# Altium PCB zulu_a7.PcbDoc (part 4 of 4)
Units mm, origin at the board's own origin, x right, y up, seen from the top; angles counter-clockwise.
Board outline 69.85 x 25.4 mm, 6 copper layers (Top Layer, L2-GND, L3-SIG, L4-SIG, L5-VCC3V3, Bottom Layer), stack 1.65 mm thick; 178 components, 177 nets, 839 pads, 534 vias.
Unrouted connection lines stored in the file: 46.
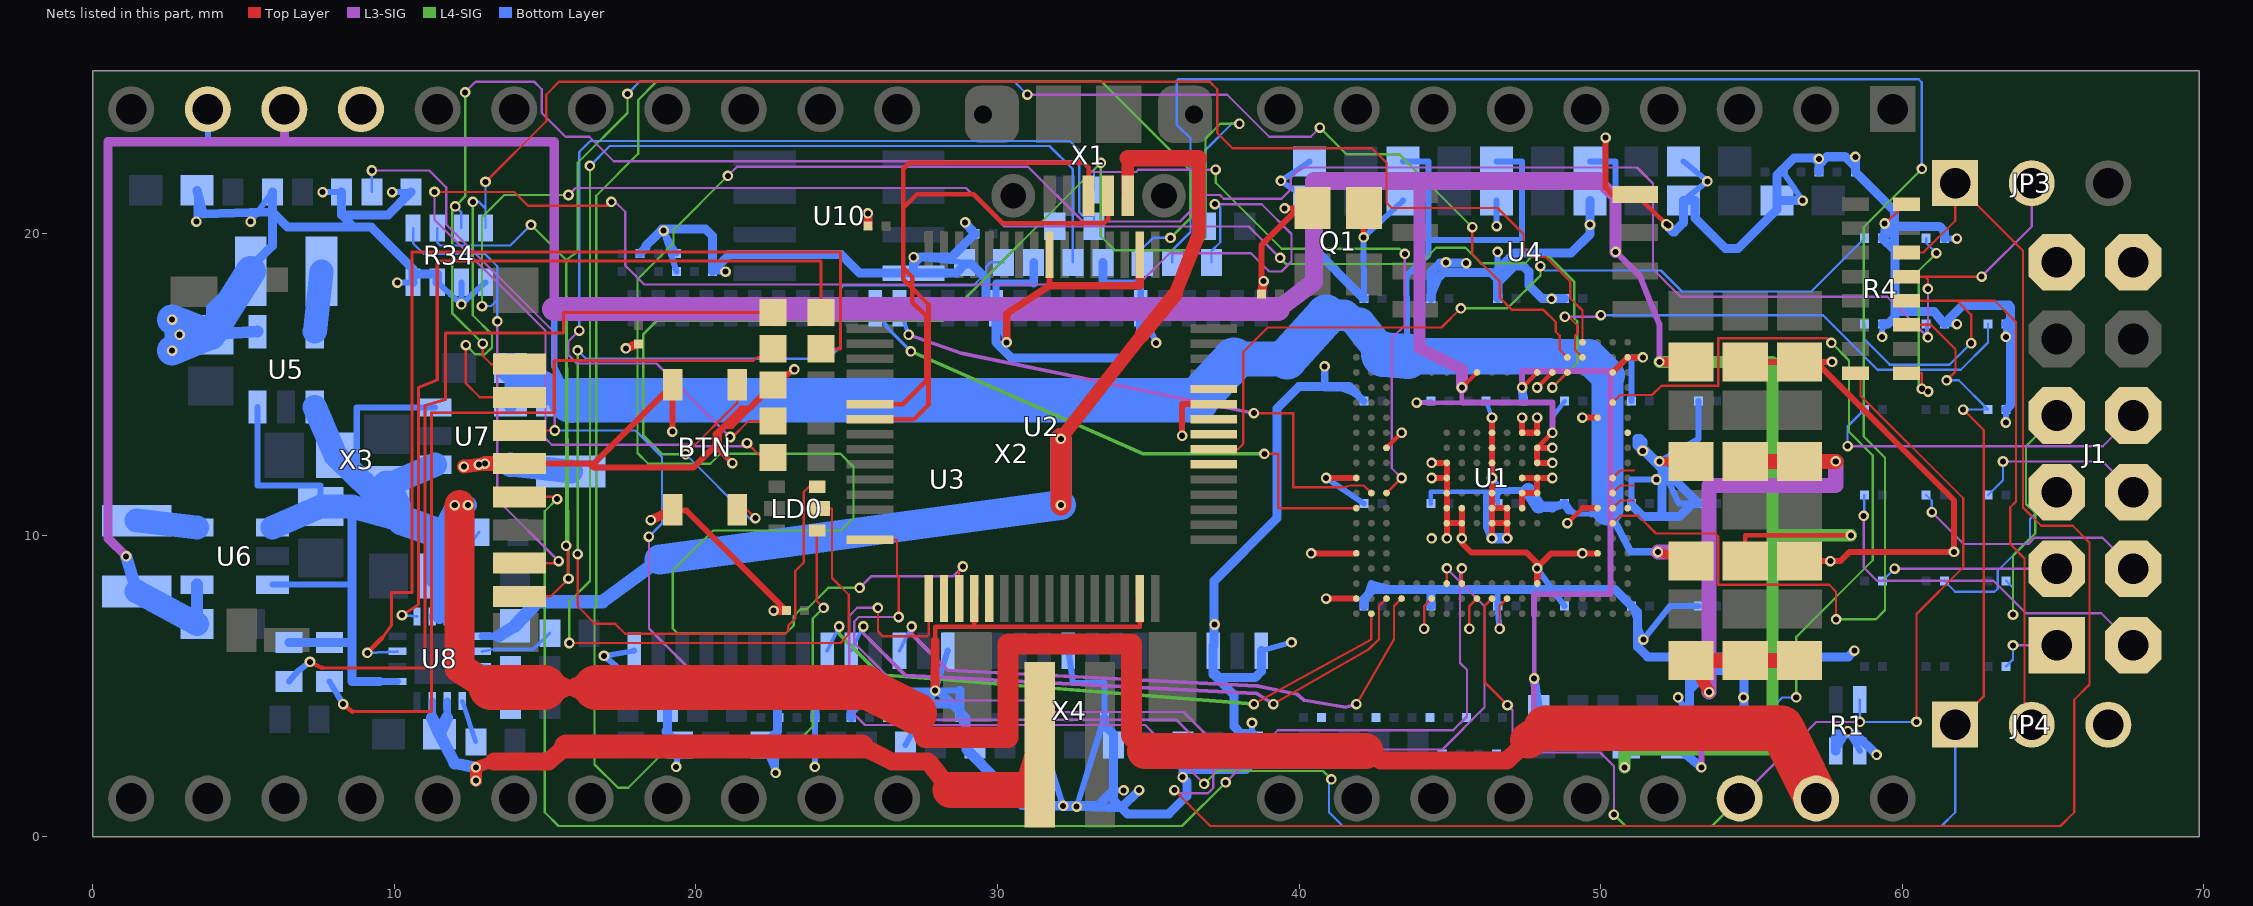
[diagram p7: the nets of this part, all layers, seen from the top]

## Via types
v1: diameter 0.35, hole 0.2, Top Layer to Bottom Layer, tented both sides, 534 vias

## Nets (pads, with @x,y where several pads share a name; then routed paths per layer and width w, separated by ;. In a path a pad name is that pad's centre, name@x,y a point inside that pad or via, vN(x,y) a via of type N, cw(c..) or ccw(c..) an arc to the next point about the centre after c; other vN are vias at no path point) (continued)
LED1: R83.1 U1.N18 | length 62
  Top Layer w0.076: U1.N18@50.4,10.4 50.65,10.65 51.113,10.65 51.25,10.65 51.841,10.058 53.797,10.058 53.899,9.957 53.899,8.357 57.582,8.357 57.81,8.128 v1(57.81,7.214)
  L4-SIG w0.076: v1(57.81,7.214) 59.131,7.214 59.436,7.518 59.436,12.573 58.725,13.284 58.725,20.218 v1(60.655,22.149)
  Bottom Layer w0.076: R83.1@35.8,19.05 35.8,19.456 36.398,20.055 36.398,23.165 35.941,23.622 35.941,25.07 35.992,25.121 60.554,25.121 60.655,25.019 v1(60.655,22.149)
LED2: R84.1 U1.M19
N$BTN: BTN.3 BTN.4 R85.1 R86.2 | length 45.4
  Top Layer w0.076: v1(19.66,12.686) 21.375,14.402 BTN.4@21.375,14.995 ; BTN.3@21.375,10.845 21.375,10.82 21.717,10.82 v1(21.971,10.566)
  L4-SIG w0.076: v1(19.66,12.686) 18.886,12.686 18.247,13.325 18.247,16.662 18.689,17.104 28.178,17.104 v1(33.426,22.352) 33.426,19.914 33.884,19.456 36.474,19.456 36.9,19.882 36.9,23.159 37.389,23.647 v1(38.024,23.647)
  Bottom Layer w0.076: v1(19.66,12.686) 21.78,10.566 v1(21.971,10.566) ; R86.2@33.2,21.45 33.2,22.126 v1(33.426,22.352) ; R85.1@36.9,20.25 36.9,22.778 37.77,23.647 v1(38.024,23.647)
N$LD0B: LD0.1 R80.2 | length 38
  Top Layer w0.076: v1(16.078,9.373) 16.078,7.645 16.662,7.061 17.323,7.061 17.653,6.731 22.962,6.731 23.063,6.833 23.063,7.01 23.292,7.239 23.292,8.814 23.571,9.093 23.571,11.432 23.749,11.61 LD0.1@24.025,11.61
  L4-SIG w0.076: v1(16.078,9.373) v1(16.078,16.129)
  Bottom Layer w0.076: v1(16.078,16.129) 16.358,15.85 24.384,15.85 24.79,16.256 24.79,18.186 24.892,18.288 29.21,18.288 29.616,18.694 29.616,18.898 29.769,19.05 R80.2@30.2,19.05
N$LD0G: LD0.5 R82.2 | length 61.6
  Top Layer w0.076: LD0.5@24.025,10.16 24.003,10.16 24.003,7.823 v1(24.232,7.595)
  L4-SIG w0.076: v1(24.232,7.595) 23.876,7.239 23.876,3.658 23.367,3.148 19.277,3.148 17.755,1.626 17.413,1.626 16.637,2.402 16.637,7.569 16.689,7.622 16.689,21.261 18.085,22.657 18.085,24.435 18.694,25.044 33.452,25.044 36.398,22.098 36.398,20.523 v1(35.738,19.863)
  Bottom Layer w0.076: R82.2@34.8,19.05 34.8,19.509 35.154,19.863 v1(35.738,19.863)
N$LD0R: LD0.3 R81.2 | length 50
  Top Layer w0.076: v1(15.799,6.426) 24.79,6.426 25.07,6.706 25.07,8.026 24.511,8.585 24.511,10.885 LD0.3@24.1,10.885
  L4-SIG w0.076: v1(15.799,6.426) 15.799,7.798 16.485,8.484 v1(16.485,22.25)
  Bottom Layer w0.076: v1(16.485,22.25) 17.142,22.907 31.728,22.907 32.5,22.135 R81.2@32.5,19.05
N$LD1A: LD1.A R83.2 | length 55.3
  Top Layer w0.076: v1(11.328,21.387) 13.97,21.387 14.427,20.93 17.069,20.93 v1(17.196,21.057) ; v1(21.692,13.056) 22.162,12.585 LD1.A@22.55,12.585
  L3-SIG w0.076: v1(11.328,21.387) 11.328,20.466 15.011,16.783 15.011,13.208 15.215,13.005 19.939,13.005 19.99,12.954 21.59,12.954 v1(21.692,13.056) ; v1(17.196,21.057) 17.323,21.057 17.653,20.726 17.653,18.948 18.288,18.313 34.671,18.313 35.712,19.355 38.405,19.355 39.014,18.745 39.421,18.745 39.751,19.075 39.751,19.99 38.76,20.98 v1(37.211,20.98)
  Bottom Layer w0.076: R83.2@37.1,19.05 37.1,19.431 37.389,19.72 37.389,20.879 37.287,20.98 v1(37.211,20.98)
N$LD2A: LD2.A R84.2 | length 34.8
  Top Layer w0.076: v1(21.133,13.259) 21.209,13.259 21.735,13.785 LD2.A@22.55,13.785
  L3-SIG w0.076: v1(16.129,16.789) 15.773,16.434 15.773,15.977 16.053,15.697 18.694,15.697 v1(21.133,13.259)
  Bottom Layer w0.076: v1(16.129,16.789) 16.129,22.708 16.495,23.074 32.4,23.074 32.715,22.758 32.715,20.701 32.817,20.599 33.2,20.599 R84.2@33.2,20.25
NetL1_1: L1.1 U5.5 | length 2
  Bottom Layer w0.8: U5.5@7.358,16.752 L1.1@7.583,18.753
NetL2_1: L2.1 U6.5 | length 2
  Bottom Layer w0.8: L2.1@1.453,10.485 U6.5@3.454,10.26
NetL3_1: L3.1 U7.5 | length 2
  Bottom Layer w0.8: U7.5@13.85,12.34 L3.1@15.851,12.115
NetLD3_A: LD3.A R107.1 | length 27
  Top Layer w0.076: 11.235,14.065 15.3,14.065
  Top Layer w0.1: 8.6,4.15 11.235,4.15 11.235,14.065 ; 15.3,14.065 15.3,15.8 21.9,15.8 LD3.A@22.55,16.185
  Top Layer w0.15: v1(8.3,4.4) 8.6,4.15
  Bottom Layer w0.2: R107.1@7.85,5.15 v1(8.3,4.4)
NetLD3_K: LD3.K U8.7 | length 33.4
  Top Layer w0.1: 9.6,6.6 9.9,7 9.9,8.1 10.575,8.1 10.575,19.4 24.8,19.4 24.8,16.185 LD3.K@24.15,16.185
  Top Layer w0.15: v1(9.1,6.1) 9.6,6.6
  Bottom Layer w0.1: v1(9.1,6.1) U8.7@10.1,6.15
NetLD4_A: LD4.A R108.1 | length 28
  Top Layer w0.1: 7.6,5.6 11.015,5.6 11.015,14.3 11.7,14.5 11.7,16.7 15.6,16.7 15.6,17.385 LD4.A@22.55,17.385
  Top Layer w0.15: v1(7.2,5.8) 7.6,5.6
  Bottom Layer w0.2: R108.1@6.5,5.15 6.8,5.5 v1(7.2,5.8)
NetLD4_K: LD4.K U8.9 | length 27.4
  Top Layer w0.1: v1(10.25,7.35) 10.795,7.7 10.795,14.9 11.42,15.15 11.42,19.1 24.15,19.1 LD4.K@24.15,17.385
  Bottom Layer w0.1: v1(10.25,7.35) U8.9@10.75,7.3
NetR102_2: R102.2 U8.16 | length 1.3
  Bottom Layer w0.1: U8.16@12.9,5.15 13.35,4.9 R102.2@13.851,4.348
NetR103_2: R103.2 U8.12 | length 3
  Bottom Layer w0.1: U8.12@12.25,7.3 12.25,7.75 12.55,8.05 12.55,9.75 R103.2@12.8,10.1
NetR104_2: R104.2 U8.14 | length 2.5
  Bottom Layer w0.1: U8.14@12.9,6.15 13.3,6.22 14.6,6.22 R104.2@15.153,6.752
NetR105_2: R105.2 U8.15 | length 1
  Bottom Layer w0.15: U8.15@12.9,5.65 R105.2@13.851,5.55
NetR106_2: R106.2 U8.1 | length 1.4
  Bottom Layer w0.15: U8.1@12.25,4.5 R106.2@12.702,3.147
NODE_P0: R10.1 R11.2 R12.2
NODE_P1: R14.1 R15.2 R16.2
PMOD-1: J1.1 R26.2 | length 2.2
  L3-SIG w0.076: v1(63.678,6.35) J1.1@65.13,6.35
  Bottom Layer w0.076: R26.2@63.45,5.65 63.678,5.878 v1(63.678,6.35)
PMOD-2: J1.2 R27.2 | length 5.9
  L3-SIG w0.076: v1(59.75,8.89) J1.2@65.13,8.89
  Bottom Layer w0.076: R27.2@59.35,8.49 v1(59.75,8.89)
PMOD-3: J1.3 R28.2 | length 6
  Bottom Layer w0.076: R28.2@61.4,8.49 61.762,8.128 63.068,8.128 63.17,8.23 63.17,8.82 64.243,9.893 64.243,10.543 J1.3@65.13,11.43
PMOD-4: J1.4 R29.2 | length 8.7
  L4-SIG w0.076: v1(63.678,7.366) 63.678,9.322 64.414,10.058 64.414,10.736 64.11,11.041 64.11,12.95 J1.4@65.13,13.97
  Bottom Layer w0.076: R29.2@63.45,8.49 63.678,8.262 v1(63.678,7.366)
PMOD-7: J1.7 R30.1 | length 12.4
  L3-SIG w0.076: v1(58.725,10.643) 58.725,8.941 59.172,8.494 63.033,8.494 64.11,7.417 66.603,7.417 J1.7@67.67,6.35
  Bottom Layer w0.076: v1(58.725,10.643) 58.75,10.668 R30.1@58.75,11.33
PMOD-8: J1.8 R31.1 | length 8.3
  L3-SIG w0.076: v1(60.985,10.77) 62.044,9.711 64.19,9.711 64.393,9.915 66.645,9.915 J1.8@67.67,8.89
  Bottom Layer w0.076: R31.1@60.8,11.33 60.985,11.145 v1(60.985,10.77)
PMOD-9: J1.9 R32.1 | length 6.1
  L3-SIG w0.076: v1(63.348,12.446) 66.654,12.446 J1.9@67.67,11.43
  Bottom Layer w0.076: R32.1@62.85,11.33 63.348,11.828 v1(63.348,12.446)
PMOD-10: J1.10 R33.1 | length 11.3
  L3-SIG w0.076: v1(58.191,12.954) 66.654,12.954 J1.10@67.67,13.97
  Bottom Layer w0.076: v1(58.191,12.954) 58.191,13.611 R33.1@58.75,14.17
PROG#: R4.1 R99.1 U2.21 | length 6.7
  Top Layer w0.076: R4.1@60.15,15.378 60.655,15.378 v1@60.655,14.978 ; v1(60.655,14.859) v1@60.655,14.978 ; v1(60.865,14.768) v1@60.655,14.978
  L4-SIG w0.076: v1(60.655,14.859) 60.554,14.961 60.554,18.771 v1(61.138,19.355)
  Bottom Layer w0.076: R99.1@60.8,19.85 60.8,19.693 v1(61.138,19.355)
PUDC_B: R23.2 U1.E18 | length 23.9
  Top Layer w0.076: U1.E18@50.4,14.4 50.65,14.65 51.113,14.65 51.709,14.65 52.019,14.961 53.899,14.961 53.899,16.535 57.506,16.535 v1(57.658,16.383)
  L4-SIG w0.076: v1(56.49,4.623) 56.49,6.629 59.03,9.169 59.03,12.649 58.242,13.437 58.242,15.799 v1(57.658,16.383)
  Bottom Layer w0.076: R23.2@55.35,3.95 56.023,4.623 v1(56.49,4.623)
RAS#: U1.V3 U3.18 | length 21
  Top Layer w0.076: v1(39.15,4.4) 42.325,6.225 42.65,6.55 42.65,7.187 42.65,7.65 U1.V3@42.9,7.9
  L3-SIG w0.125: v1(25.55,6.975) 25.55,6.75 26.95,5.35 38.6,4.75 v1(39.15,4.4)
  Bottom Layer w0.125: U3.18@25.15,6.17 v1(25.55,6.975)
RST#: R1.2 R4.16 U1.V10 X2.23 | length 36.6
  Top Layer w0.076: U1.V10@46.4,7.9 46.15,7.65 46.15,7.187 46.15,5.132 v1(46.914,4.369) ; R4.16@58.45,15.378 58.623,15.378 58.623,14.63 62.027,11.227 62.027,8.941 60.477,7.391 v1(60.477,3.81)
  L3-SIG w0.076: v1(46.914,4.369) 47.08,4.203 47.08,3.251 47.537,2.794 49.987,2.794 50.444,2.337 v1(50.444,0.737) ; X2.23@54.61,1.27 57.15,3.81 v1(58.6,3.81)
  L4-SIG w0.076: v1(50.444,0.737) 50.825,0.356 53.696,0.356 X2.23@54.61,1.27
  Bottom Layer w0.076: R1.2@58.6,4.55 v1(58.6,3.81) v1(60.477,3.81)
SD-CLK: U1.U8 X3.5 | length 49.6
  Top Layer w0.076: X3.5@14.15,11.275 15.319,11.275 v1(15.392,11.201) ; U1.U8@45.4,8.4 v1(45.4,8.9)
  L3-SIG w0.076: v1(37.567,1.803) 39.294,3.531 45.11,3.531 45.568,3.988 45.568,5.537 45.339,5.766 45.339,8.839 v1(45.4,8.9)
  L4-SIG w0.076: v1(15.392,11.201) 14.986,10.795 14.986,0.813 15.443,0.356 36.119,0.356 v1(37.567,1.803)
SD-CMD: R35.1 U1.U7 X3.3 | length 59.5
  Top Layer w0.076: X3.3@14.15,13.475 v1(15.316,13.475) ; U1.U7@44.9,8.4 v1(44.9,8.9)
  L3-SIG w0.076: v1(9.25,22.098) 11.155,22.098 11.714,21.539 11.714,20.316 15.316,16.713 v1(15.316,13.475) ; v1(18.44,9.957) 18.44,6.909 19.888,5.461 25.476,5.461 26.416,4.521 31.293,4.521 31.674,4.14 36.17,4.14 37.414,2.896 44.755,2.896 46.152,4.293 46.152,7.648 v1(44.9,8.9)
  Bottom Layer w0.076: R35.1@9.25,21.39 v1(9.25,22.098) ; v1(15.316,13.475) 17.996,13.475 18.872,12.598 18.872,10.389 v1(18.44,9.957)
SD-DAT0: R34.1 U1.C15 X3.7 | length 62.2
  Top Layer w0.076: X3.7@14.15,9.075 15.374,9.075 v1(15.443,9.144) ; v1(48.4,14.9) U1.C15@48.9,15.4
  L3-SIG w0.076: v1(13.411,17.094) 13.411,11.176 v1(15.443,9.144) ; v1(15.773,21.285) 16.002,21.514 28.956,21.514 30.231,20.239 38.33,20.239 v1(39.37,19.199)
  L4-SIG w0.076: v1(12.903,17.602) 12.903,20.549 13.64,21.285 v1(15.773,21.285) ; v1(39.37,19.199) 39.57,18.999 44.018,18.999 44.552,19.533 45.517,19.533 46.025,19.025 47.501,19.025 47.703,19.226 48.309,19.226 49.124,18.412 49.124,17.196 49.225,17.094 49.225,15.725 v1(48.4,14.9)
  Bottom Layer w0.076: R34.1@10.62,20.19 10.62,19.682 10.973,19.329 13.005,19.329 13.411,18.923 13.411,17.805 ; v1(12.903,17.602) 13.208,17.602 13.411,17.805 ; v1(13.411,17.094) 13.411,17.805
SD-DAT1: R34.2 U1.B15 X3.8 | length 71.7
  Top Layer w0.076: X3.8@14.15,7.975 15.188,7.975 v1@15.748,8.534 ; v1(15.697,9.652) 15.748,9.601 v1@15.748,8.534 ; v1(15.773,8.56) v1@15.748,8.534 ; v1(45.745,20.218) 45.745,19.329 46.66,18.415 46.66,17.882 47.066,17.475 48.108,17.475 48.514,17.069 48.514,16.749 48.65,16.613 48.65,16.15 U1.B15@48.9,15.9
  L3-SIG w0.076: v1(30.988,24.613) 37.617,24.613 39.014,23.216 40.386,23.216 v1(40.691,23.52)
  L4-SIG w0.076: v1(14.529,20.295) 15.697,19.126 ; v1(15.697,9.652) 15.697,19.126 ; v1(15.773,8.56) 15.766,9.653 15.697,19.126 ; v1(17.729,24.638) 17.729,24.003 16.078,22.352 16.078,19.406 15.697,19.126 ; v1(40.691,23.52) 41.58,22.631 43.332,22.631 v1(45.745,20.218)
  Bottom Layer w0.076: R34.2@11.42,20.19 11.42,19.71 11.522,19.609 13.843,19.609 v1(14.529,20.295) ; v1(17.729,24.638) 18.136,25.044 30.556,25.044 v1(30.988,24.613)
SD-DAT2: R34.3 U1.L3 X3.1 | length 54.4
  Top Layer w0.076: v1(12.929,16.358) 12.929,15.954 13.208,15.675 X3.1@14.15,15.675 ; U1.L3@42.9,11.4 v1(43.4,11.9)
  L3-SIG w0.076: v1(12.344,24.689) 12.7,25.044 14.63,25.044 14.884,24.79 14.884,24.003 15.672,23.216 16.459,23.216 17.272,22.403 32.766,22.403 33.122,22.047 34.595,22.047 34.671,22.123 v1(37.236,22.123) ; v1(43.4,11.9) 43.078,12.222 43.078,16.535 43.51,16.967 v1(43.51,19.329)
  L4-SIG w0.076: v1(12.344,24.689) 12.344,21.232 v1(12.017,20.904) 11.913,20.8 11.913,17.374 v1(12.929,16.358) ; v1(37.236,22.123) 37.236,21.693 39.424,19.506 43.334,19.506 v1(43.51,19.329)
  Bottom Layer w0.076: v1(12.017,20.904) 12.22,20.701 R34.3@12.22,20.19
SD-DAT3: R34.4 U1.A16 X3.2 | length 56.2
  Top Layer w0.076: v1(12.37,16.307) 12.37,15.037 12.832,14.575 X3.2@14.15,14.575 ; v1(13.02,21.717) 15.037,23.734 15.037,24.613 15.469,25.044 37.033,25.044 37.287,24.79 37.287,23.343 37.795,22.835 42.418,22.835 42.901,22.352 42.901,21.031 43.078,20.853 46.584,20.853 47.447,19.99 47.447,19.507 47.728,19.226 48.184,19.226 48.995,18.415 48.995,17.858 49.4,17.453 U1.A16@49.4,16.4
  L4-SIG w0.076: v1(12.37,16.307) 12.675,16.002 13.005,16.002 13.233,16.231 13.233,16.662 12.598,17.297 v1(12.598,21.057)
  Bottom Layer w0.076: v1(12.598,21.057) 12.802,21.057 13.02,20.838 ; R34.4@13.02,20.19 13.02,20.838 ; v1(13.02,21.717) 13.02,20.838
SDRAM-CLK: U1.M1 U3.38 | length 19.2
  Top Layer w0.076: v1(38.85,12.7) 39.312,12.7 39.312,10.9 41.5,10.9 U1.M1@41.9,10.9
  L4-SIG w0.125: v1(27.125,16.1) 34.825,12.7 v1(38.85,12.7)
  Bottom Layer w0.125: U3.38@25.95,17.53 26.375,16.85 v1(27.125,16.1)
SDRAM-CS#: U1.W2 U3.19 | length 20.8
  Top Layer w0.076: v1(38.5,4.4) 42.4,6.55 U1.W2@42.4,7.4
  L4-SIG w0.125: v1(24.75,6.975) 24.75,6.725 26.1,5.375 v1(38.5,4.4)
  Bottom Layer w0.125: U3.19@24.35,6.17 v1(24.75,6.975)
TCK: JP3.1 R4.6 U2.16 | length 79
  Top Layer w0.076: U2.16@25.775,9.85 26.67,9.85 26.67,8.687 26.721,8.636 v1(26.721,7.29) ; v1(35.865,1.549) 37.059,0.356 65.253,0.356 65.71,0.813 65.71,4.547 66.218,5.055 66.218,9.754 65.659,10.312 64.618,10.312 64.008,10.922 64.008,19.432 JP3.1@61.76,21.68 61.76,20.433 60.705,19.378 R4.6@60.15,19.378
  L3-SIG w0.076: v1(26.721,7.29) 25.4,7.29 25.247,7.137 25.247,6.426 27.787,3.886 35.916,3.886 37.16,2.642 37.16,1.626 36.982,1.448 35.966,1.448 v1(35.865,1.549)
TDI: JP4.1 R4.3 R90.1 U2.17 | length 67.2
  Top Layer w0.076: v1(26.035,7.595) 26.035,6.807 26.187,6.655 27.674,6.655 27.725,6.706 U2.17@27.725,7.9 ; R4.3@60.15,16.978 60.96,16.978 61.771,16.167 61.771,15.434 v1(61.475,15.138) ; JP4.1@61.76,3.72 62.712,4.672 62.712,13.485 v1(62.027,14.17)
  L3-SIG w0.076: v1(26.035,7.595) 25.349,7.595 25.081,7.326 25.081,4.231 25.603,3.708 34.9,3.708 v1(36.855,1.753)
  L4-SIG w0.076: v1(36.855,1.753) 37.287,2.184 40.792,2.184 v1(41.072,1.905)
  Bottom Layer w0.076: v1(41.072,1.905) 40.996,1.829 40.996,0.813 41.453,0.356 61.303,0.356 61.76,0.813 JP4.1@61.76,3.72 ; v1(61.475,15.138) 61.882,15.138 R90.1@62.85,14.17 v1(62.027,14.17)
TDO: JP4.2 R4.4 R91.1 U2.18 | length 24.1
  Top Layer w0.076: R4.4@60.15,17.778 61.826,17.778 ; v1(62.289,16.368) 62.289,17.314 61.826,17.778 ; JP4.2@64.3,3.72 64.062,3.72 64.062,9.23 63.584,9.709 63.584,10.927 63.779,11.123 63.779,17.069 63.07,17.778 61.826,17.778
  Bottom Layer w0.076: R91.1@58.75,17.01 58.75,16.499 59.596,15.653 61.575,15.653 v1(62.289,16.368)
TMS: JP3.2 R4.5 R92.1 U2.19 | length 94.9
  Top Layer w0.076: U2.19@28.725,7.9 28.725,8.834 v1(28.854,8.964) ; R4.5@60.15,18.578 60.757,18.578 ; v1(60.858,18.172) 60.858,18.476 60.757,18.578 ; v1(62.636,18.578) 60.757,18.578
  L3-SIG w0.076: v1(21.057,21.92) 21.361,22.225 31.013,22.225 32.833,20.405 36.052,20.405 36.93,21.284 37.381,21.284 37.506,21.158 39.421,21.158 39.726,21.463 39.726,21.844 40.081,22.2 51.206,22.2 51.74,21.666 51.74,18.821 52.654,17.907 59.512,17.907 v1(60.858,16.561) v1(60.858,18.172) ; v1(25.425,8.255) 25.806,8.636 28.527,8.636 v1(28.854,8.964) ; v1(62.636,18.578) 64.3,20.242 JP3.2@64.3,21.68
  L4-SIG w0.076: v1(21.057,21.92) 19.253,20.117 19.253,19.685 18.059,18.491 18.059,12.725 18.415,12.37 20.472,12.37 20.803,12.7 24.79,12.7 25.222,12.268 25.222,10.566 24.816,10.16 20.574,10.16 19.228,8.814 19.228,6.909 19.406,6.731 22.962,6.731 23.241,7.01 23.241,7.315 23.47,7.544 23.673,7.544 24.384,8.255 v1(25.425,8.255)
  Bottom Layer w0.076: R92.1@60.8,17.01 60.8,16.619 v1(60.858,16.561)
UART_FT_CTS#: R93.1 U1.B16 U2.41 | length 17.5
  Top Layer w0.076: v1(48.819,17.247) 48.946,17.247 49.225,16.967 49.225,16.688 49.15,16.613 49.15,16.15 U1.B16@49.4,15.9
  L3-SIG w0.076: v1(48.819,17.247) 49.962,17.247 v1(50.013,17.297)
  Bottom Layer w0.076: v1(50.013,17.297) 57.379,17.297 59.189,15.487 61.944,15.487 62.85,16.394 R93.1@62.85,17.01
UART_FT_DTR#: U1.M18 U2.43 | length 0.8
  Top Layer w0.076: U1.M18@50.4,10.9 50.65,11.15 51.113,11.15
UART_FT_RTS#: U1.L18 U2.40 | length 0.8
  Top Layer w0.076: U1.L18@50.4,11.4 50.65,11.65 51.113,11.65
UART_FT_RXD: R94.1 U1.G19 U2.39 | length 27.1
  Top Layer w0.076: U2.39@37.175,12.85 37.973,12.85 38.151,13.028 38.151,16.078 38.964,16.891 44.729,16.891 v1(45.364,17.526)
  L4-SIG w0.076: v1(45.364,17.526) 46.914,17.526 48.006,18.618 v1(48.006,18.923)
  Bottom Layer w0.076: v1(48.006,18.923) 48.146,18.783 52.007,18.783 52.705,18.085 56.985,18.085 R94.1@58.75,19.85
UART_FT_TXD: U1.K18 U2.38 | length 0.8
  Top Layer w0.076: U1.K18@50.4,11.9 50.65,12.15 51.113,12.15
UDQM: U1.L2 U3.39 | length 19.2
  Top Layer w0.076: v1(38.5,14.05) 39.812,14.05 39.812,11.59 41.5,11.59 41.687,11.65 42.15,11.65 U1.L2@42.4,11.4
  L3-SIG w0.125: v1(27.05,16.65) 28.85,16.025 v1(38.5,14.05)
  Bottom Layer w0.125: U3.39@26.75,17.53 v1(27.05,16.65)
USB5V0: C150.2 U8.13 X1.1 | length 39
  Top Layer w0.4: X1.1@34.32,21.259 34.32,22.5
  Top Layer w0.45: v1(32.1,13.2) 34.8,16.65 ; 35.9,18 36.68,20 36.68,22.5
  Top Layer w0.5: 34.8,16.65 35.9,18
  Top Layer w0.55: 34.32,22.5 36.68,22.5
  Top Layer w0.7: v1(32.1,11) v1(32.1,13.2)
  Bottom Layer w0.24: U8.13@12.9,6.65 13.45,6.65
  Bottom Layer w0.4: 13.45,6.65 C150.2@14.001,7
  Bottom Layer w0.45: C150.2@14.002,7 14.75,7.8 16.9,7.8 18.8,9.2
  Bottom Layer w0.7: v1(32.1,11) v1(32.1,13.2)
  Bottom Layer w1: 18.8,9.2 v1(32.1,11)
USB_D_N: U2.7 X1.2 | length 16.4
  Top Layer w0.15: U2.7@25.775,14.35 26.863,14.35 27.635,15.122 27.635,17.272 27.178,17.729 27.178,18.567 26.873,18.872 26.873,20.853 27.33,21.311 29.209,21.311 30.174,20.345 33.528,20.345 33.67,20.487 X1.2@33.67,21.258
USB_D_P: U2.8 X1.3 | length 17.5
  Top Layer w0.15: U2.8@25.775,13.85 27.229,13.85 27.711,14.333 27.711,17.653 26.873,18.491 26.873,22.149 27.076,22.352 32.868,22.352 33.02,22.2 X1.3@33.02,21.258
VBATT: C151.2 U8.2 U8.3 X4.1 | length 25.6
  Top Layer w0.4: v1(12.7,1.86) v1(12.7,2.3) 13.3,2.5
  Top Layer w0.6: 13.3,2.5 15.1,2.5 15.7,3 ; 25.5,3 26.5,2.5 27.7,2.5 28.45,1.55
  Top Layer w0.8: 15.7,3 25.5,3 ; X4.1@30.95,1.55 X4.1@31.4,3.05
  Top Layer w1.2: 28.45,1.55 X4.1@30.95,1.55
  Bottom Layer w0.24: 11.25,3.948 U8.3@11.25,4.5 ; 11.75,3.948 U8.2@11.75,4.5
  Bottom Layer w0.4: 11.25,3.948 C151.2@11.5,3.399 ; 11.75,3.948 C151.2@11.5,3.399 ; v1(12.7,1.86) v1(12.7,2.3) 12,2.44 C151.2@11.5,3.398
VCC1V0: C84.2 C85.1 C86.1 C87.1 C88.1 C89.1 C90.1 C91.1 C92.1 C140.1 C141.1 C142.1 C143.1 L3.2 U1.G10 U1.H10 U1.J10 U1.L10 U1.M10 U1.M11 U1.N10 U1.N11 U7.4 X2.19 | length 124.6
  Top Layer w0.2: v1(46.4,9.9) U1.N10@46.4,10.4 ; v1(46.4,13.9) U1.G10@46.4,13.4 U1.H10@46.4,12.9 U1.J10@46.4,12.4 v1(46.4,11.9) U1.M10@46.4,10.9 ; v1(46.9,9.9) U1.N11@46.9,10.4 ; U1.N10@46.4,10.4 U1.N11@46.9,10.4 ; U1.N10@46.4,10.4 U1.M10@46.4,10.9 ; U1.M10@46.4,10.9 U1.M11@46.9,10.9 U1.N11@46.9,10.4
  Top Layer w0.3: v1(51.9,9.445) C143.1@53,9.15
  Top Layer w0.4: C140.1@53,5.85 v1(53.6,4.8)
  Top Layer w0.5: C140.1@53,5.85 C141.1@54.8,5.85 C142.1@56.6,5.85 ; C85.1@54.8,12.45 C86.1@56.6,12.45 v1(57.8,12.45)
  L3-SIG w0.5: v1(51.9,9.445) 53.6,9.445 ; v1(53.6,4.8) 53.6,9.445 ; v1(57.8,12.45) 57.8,11.65 53.6,11.65 53.6,9.445
  Bottom Layer w0.15: C90.1@44.37,11.05 44.37,11.45 46.501,11.45 ; C92.1@46.2,14.45 v1(46.4,13.9) ; v1(46.4,11.9) 46.501,11.45 ; C91.1@48.81,11.05 47.9,11.05 47.863,11.087 47.5,11.45 46.59,11.45 ; 46.501,11.45 46.509,11.414 C89.1@46.59,11.05 46.59,11.45 ; 46.501,11.45 46.59,11.45
  Bottom Layer w0.16: v1(46.4,11.9) 46.75,11.5
  Bottom Layer w0.175: 49.18,10.708 49.7,10.708
  Bottom Layer w0.2: X2.19@3.81,24.13 3.81,23.05 15.3,23.05 15.3,15.6 L3.2@15.851,14.465 ; C87.1@43.45,22.4 44.3,22.4 44.3,19.8 ; 43.6,15.935 43.56,18.6 44.3,19.3 44.3,19.8 ; C88.1@46.55,22.4 47.4,22.4 47.4,19.8 44.3,19.8
  Bottom Layer w0.205: 46.75,11.5 47.6,11.5
  Bottom Layer w0.21: 48.95,10.84 49.18,10.708
  Bottom Layer w0.235: 49.7,10.708 50.23,10.85
  Bottom Layer w0.25: 50.23,10.85 50.6,10.2 51,9.45 v1(51.9,9.445)
  Bottom Layer w0.3: v1(46.4,9.9) 46.25,10.3 46.25,11.3 46.509,11.414 46.59,11.45 ; 48.4,10.93 C91.1@48.81,11.05 48.95,10.84
  Bottom Layer w0.345: 47.95,10.95 48.4,10.93
  Bottom Layer w0.35: v1(46.4,9.9) v1(46.9,9.9)
  Bottom Layer w0.4: U7.4@13.85,14.24 C84.2@13.85,15.541
  Bottom Layer w0.47: 47.6,11.5 47.863,11.087 47.95,10.95
  Bottom Layer w0.96: 41.5,17.3 42,17
  Bottom Layer w1: C84.2@13.85,15.541 L3.2@15.851,14.465
  Bottom Layer w1.04: 40.9,17.3 41.5,17.3
  Bottom Layer w1.06: 50.23,10.85 50.23,15.3
  Bottom Layer w1.095: 42,17 42.8,16
  Bottom Layer w1.14: 48.3,15.935 49.6,15.935
  Bottom Layer w1.15: 49.6,15.935 50.23,15.3
  Bottom Layer w1.16: 37.85,15.85 39.6,15.85
  Bottom Layer w1.2: 43.6,15.935 48.3,15.935
  Bottom Layer w1.355: 39.6,15.85 40.9,17.3
  Bottom Layer w1.425: 36.6,14.49 37.85,15.85
  Bottom Layer w1.5: L3.2@15.851,14.465 36.6,14.49 ; 42.8,16 43.6,15.935
VCC1V8: C82.2 C93.1 C94.1 C95.1 C96.1 C144.1 L2.2 L7.1 U1.C9 U1.H13 U1.J13 U6.4 X2.18 | length 138.2
  Top Layer w0.15: v1(45.4,14.9) U1.C9@45.9,15.4 ; U1.H13@47.9,12.9 v1(48.4,13.4) ; C144.1@54.8,9.15 54.8,10 v1(58.3,10)
  Top Layer w0.2: v1(48.4,12.4) U1.J13@47.9,12.4 U1.H13@47.9,12.9 v1(48.4,12.9)
  Top Layer w0.3: v1(51.95,15.75) C93.1@53,15.749
  L3-SIG w0.15: v1(43.9,14.4) 45.4,14.4 v1(45.4,14.9)
  L3-SIG w0.2: 45.4,14.4 48.4,14.4 v1(48.4,13.4) ; v1(50.5,19.4) 51.3,18.6 51.95,17 v1(51.95,15.75)
  L3-SIG w0.3: v1(1.1,9.3) 0.5,9.9 0.5,23.05 6.35,23.05 ; X2.18@6.35,24.13 6.35,23.05 ; 15.3,17.5 15.3,23.05 6.35,23.05
  L3-SIG w0.4: 44,21.75 44,16.2 45.4,15.5 v1(45.4,14.9) ; 49.95,21.75 50.5,21.2 v1(50.5,19.4)
  L3-SIG w0.6: 39.3,17.5 40.5,18.4 40.5,21.75 44,21.75 49.95,21.75
  L3-SIG w0.8: 15.3,17.5 39.3,17.5
  L4-SIG w0.4: v1(50.8,2.3) 50.8,2.9 55.7,2.9 55.7,10 ; v1(51.95,15.75) 55.7,15.75 55.7,10 ; v1(58.3,10) 55.7,10
  Bottom Layer w0.15: v1(43.9,14.4) C96.1@44.37,14.45 ; v1(48.4,13.4) 48.4,13.9 C95.1@48.81,14.45
  Bottom Layer w0.2: C94.1@49.65,22.4 50.5,22.4 v1(50.5,19.4)
  Bottom Layer w0.3: v1(50.8,2.3) L7.1@50.85,3.05
  Bottom Layer w0.4: v1(1.1,9.3) L2.2@1.453,8.135 ; C82.2@3.454,7.059 U6.4@3.454,8.36
  Bottom Layer w0.8: L2.2@1.453,8.135 C82.2@3.454,7.059
VCC3V3: BTN.1 BTN.2 C3.2 C4.2 C5.2 C6.2 C7.2 C8.2 C9.2 C11.2 C12.2 C13.2 C38.2 C80.2 C97.1 C98.1 C99.1 C100.1 C101.1 C102.1 C103.1 C104.1 C105.1 C106.1 C107.1 C108.1 C109.1 C110.1 C111.1 C112.1 C113.1 C114.1 C115.1 C116.1 C117.1 C118.1 C119.1 C120.1 C121.1 C122.1 C133.2 C134.2 C135.2 C136.2 C137.2 C138.2 C145.1 C146.1 C155.2 C156.2 C157.2 C158.2 C159.2 J1.6 J1.12 JP4.3 L1.2 L4.2 L5.2 LD5.A Q1.1 Q1.4 R1.3 R1.4 R2.2 R4.8 R6.2 R7.2 R19.2 R20.2 R23.1 R34.5 R34.6 R34.7 R34.8 R35.2 R80.1 R81.1 R82.1 R90.2 R91.2 R92.2 R93.2 R94.2 R96.2 R97.2 R98.2 R99.2 U1.B19 U1.C14 U1.C18 U1.F17 U1.G12 U1.G13 U1.H3 U1.J7 U1.K1 U1.K7 U1.K12 U1.K13 U1.L7 U1.L12 U1.L13 U1.M7 U1.M8 U1.M12 U1.M17 U1.N7 U1.N8 U1.R1 U1.R17 U1.U13 U1.V1 U1.V6 U1.V9 U1.V11 U2.20 U2.31 U2.42 U2.50 U2.56 U3.1 U3.3 U3.9 U3.14 U3.27 U3.43 U3.49 U4.8 U5.4 U10.8 X2.17 X3.4 | length 409.8
  Top Layer w0.076: v1(44.15,6.9) 44.15,7.65 U1.V6@44.4,7.9 ; v1(45.65,6.9) 45.65,7.65 U1.V9@45.9,7.9 ; v1(46.65,6.9) 46.65,7.65 U1.V11@46.9,7.9
  Top Layer w0.08: v1(59.42,20.34) R4.8@60.15,20.978
  Top Layer w0.145: 27.93,6.5 27.93,6.962 29.225,6.962 ; U2.20@29.225,7.2 29.225,6.962 ; U2.31@34.725,7.2 34.725,6.962 29.225,6.962 ; U4.8@51.15,21.305 v1(52.18,20.32)
  Top Layer w0.15: U1.H3@42.9,12.9 v1(43.4,13.4) ; v1(47.9,14.9) U1.C14@48.4,15.4 ; v1(48.9,10.4) 49.4,10.9
  Top Layer w0.2: v1(13,12.375) v1@12.832,12.375 ; v1(19.22,13.44) BTN.2@19.225,14.995 19.225,14.99 16.61,12.375 X3.4@14.15,12.375 ; BTN.1@19.225,10.845 19.225,10.82 19.68,10.82 C159.2@23,7.5 ; v1(21.209,12.395) 20.768,12.836 20.768,13.411 20.98,13.624 21.189,13.624 LD5.A@22.55,14.985 ; v1(23.26,15.5) LD5.A@22.55,14.985 ; 31.725,18.28 U2.56@31.725,19.3 ; v1(36.12,13.3) 36.12,14.35 U2.42@37.175,14.35 ; C157.2@38.75,18 38.76,18 38.76,19.631 39.98,20.85 Q1.1@40.45,20.85 v1(39.52,20.84) ; v1(40.4,9.4) U1.R1@41.9,9.4 ; v1(40.9,7.9) U1.V1@41.9,7.9 ; v1(40.9,11.9) U1.K1@41.9,11.9 ; v1(42.14,19.88) Q1.4@42.15,20.85 ; v1(44.4,11.9) U1.K7@44.9,11.9 ; v1(44.4,12.4) U1.J7@44.9,12.4 U1.K7@44.9,11.9 ; v1(44.9,9.9) U1.M7@44.9,10.9 ; U1.M8@45.4,10.9 v1(45.4,9.9) ; U1.M12@47.4,10.9 U1.L12@47.4,11.4 U1.L13@47.9,11.4 U1.K13@47.9,11.9 ; U1.K12@47.4,11.9 U1.K13@47.9,11.9 ; v1(47.4,13.9) U1.G12@47.4,13.4 U1.G13@47.9,13.4 v1(47.9,13.9) ; v1(48.4,11.9) U1.K13@47.9,11.9 ; v1(49.4,9.4) U1.R17@49.9,9.4 48.359,9.4 v1@47.966,9.007 ; 49.4,10.9 U1.M17@49.9,10.9 ; v1(49.4,13.9) U1.F17@49.9,13.9 ; v1(50.165,23.19) 50.165,21.534 50.394,21.305 U4.8@51.15,21.305 ; U1.C18@50.4,15.4 U1.B19@50.9,15.9 v1(51.4,15.9) ; C97.1@54.8,15.749 C98.1@56.6,15.749 ; v1(57.62,9.14) C145.1@56.6,9.15 57.963,9.15 58.262,9.449 v1(61.722,9.449) 61.722,11.159 57.132,15.749 C98.1@56.6,15.749 ; v1(57.675,15.749) C98.1@56.6,15.749 ; v1@12.832,12.375 13.575,12.375 X3.4@14.15,12.375 ; v1@12.832,12.375 v1(12.802,12.344) v1@12.832,12.375 ; X3.4@14.15,12.375 16.479,12.375 16.612,12.243 19.914,12.243 20.65,12.979 20.65,13.354 21.492,14.196 21.761,14.196 LD5.A@22.55,14.985 ; U1.M7@44.9,10.9 U1.N7@44.9,10.4 U1.N8@45.4,10.4 v1(45.4,9.9) ; U1.M7@44.9,10.9 U1.L7@44.9,11.4 ; U1.L7@44.9,11.4 U1.K7@44.9,11.9 ; U1.L7@44.9,11.4 U1.K7@44.9,11.9 ; v1(45.4,9.9) 45.4,9.743 45.72,9.423 47.549,9.423 v1@47.966,9.007 ; U1.U13@47.9,8.4 47.954,8.894 v1@47.966,9.007 ; U1.U13@47.9,8.4 v1(47.9,8.9) ; U1.U13@47.9,8.4 v1(47.9,8.9) ; v1(47.9,8.9) 47.9,8.941 v1@47.966,9.007
  Top Layer w0.25: v1(30.3,16.4) 30.3,17.35 31.725,18.28 34.725,18.28
  Top Layer w0.28: U2.20@29.225,7.2 U2.20@29.225,7.9 ; U2.31@34.725,7.2 U2.31@34.725,7.9 ; 34.725,18.28 U2.50@34.725,19.3
  Top Layer w0.3: v1(17.675,16.2) C158.2@18.1,16.35 ; v1(18.5,10.5) BTN.1@19.225,10.845 ; v1(22.575,7.5) C159.2@23,7.5 ; C155.2@25.7,20.25 v1(25.7,20.675) ; v1(27.93,4.85) 27.93,6.5 ; C157.2@38.75,18 v1(38.825,18.425) ; v1(51.95,12.45) C146.1@53,12.45
  Top Layer w0.46: v1(12.3,12.275) v1(13,12.375)
  Top Layer w0.5: v1(13,12.375) X3.4@14.15,12.375
  Bottom Layer w0.2: v1(3.433,20.4) C13.2@3.45,21.44 ; v1(5.233,20.4) C11.2@5.95,21.39 ; v1(7.62,21.38) C12.2@8.25,21.39 ; v1(9.92,21.38) R35.2@10.55,21.39 ; v1(10.1,18.38) R34.8@10.62,18.39 ; R34.7@11.42,18.39 11.856,17.992 v1(12.22,17.66) ; R34.6@12.22,18.39 v1(12.22,17.66) ; R34.5@13.02,18.39 12.583,17.992 v1(12.22,17.66) ; U3.27@17.95,6.17 v1(16.95,6) C9.2@19.05,4.25 ; R97.2@18.15,19.35 v1(18.925,20.1) ; v1(19.34,2.32) L4.2@19.45,3.05 ; R19.2@19.35,18.75 19.178,19.296 v1(18.925,20.1) ; R98.2@19.35,19.35 v1(18.925,20.1) ; R96.2@20.55,18.75 v1(20.98,18.74) ; L5.2@22.25,3.05 v1(22.64,2.12) 22.694,3.023 C133.2@22.75,3.95 ; v1(23.94,2.32) C134.2@23.95,3.95 ; C135.2@25.15,3.95 25.15,4.85 26.35,4.85 ; C136.2@26.35,3.95 26.35,4.85 ; C3.2@26.95,3.05 27.465,3.996 v1(27.93,4.85) ; U10.8@27.215,18.695 v1(27.22,19.22) R80.1@28.9,19.05 ; C137.2@27.55,3.95 v1(27.93,4.85) ; U3.14@28.35,6.17 v1(27.93,4.85) ; C138.2@28.75,3.95 C4.2@29.25,3.05 ; 28.749,4.85 v1(27.93,4.85) ; U3.43@29.95,17.53 v1(30.3,16.4) ; C5.2@31.55,3.05 v1(32.175,1.025) ; U3.9@32.35,6.17 32.5,5.1 33.549,5.1 C38.2@33.549,3.95 33.319,3.216 v1(32.625,1) ; C6.2@33.85,3.05 33.85,1.54 v1(34.18,1.54) ; U3.49@34.75,17.53 v1(35.26,16.38) ; v1(36.14,1.98) C7.2@36.15,3.05 ; U3.3@37.15,6.17 v1(37.2,7.04) ; v1(38.44,3.78) C8.2@38.45,3.05 ; U3.1@38.75,6.17 v1(39.75,6.45) ; C100.1@40.35,21.1 v1(39.4,21.75) C106.1@40.35,22.4 ; v1(40.9,11.9) C108.1@42.15,11.05 ; C120.1@42.15,17.85 v1(42.14,19.88) C101.1@43.45,21.1 ; 42.4,8.4 43.2,8.2 44.37,8.2 46.59,8.2 C107.1@46.59,7.65 v1(46.65,6.9) ; C117.1@44.37,17.85 v1(44.875,19.05) ; C102.1@46.55,21.1 v1(46.55,20.25) ; C116.1@46.59,17.85 v1(46.59,19.4) ; v1(47.9,8.9) C110.1@48.81,7.65 ; v1(48.38,17.84) C118.1@48.81,17.85 ; C115.1@51.03,7.65 v1(51.42,6.54) 52.3,7.65 C122.1@53.25,7.65 ; C111.1@51.03,11.05 51.03,11.85 v1(51.85,11.85) ; C114.1@51.03,14.45 51.03,15.9 v1(51.4,15.9) ; v1(52.575,4.625) R20.2@52.95,3.95 ; C104.1@52.749,21.1 v1(53.54,21.74) C99.1@52.749,22.4 ; C119.1@53.25,11.05 52.6,11.05 v1(51.95,12.45) 53.25,13.2 C121.1@53.25,14.45 ; v1(54.74,4.62) R23.1@54.75,3.95 ; R2.2@56.049,22.05 56.428,21.497 v1(56.7,21.1) ; v1(57.24,22.48) R6.2@57.249,22.05 ; R1.4@57.8,2.85 v1(58.2,3.5) R1.3@58.6,2.85 ; v1(59.34,16.58) R91.2@59.35,17.01 ; R94.2@59.35,19.85 v1(59.42,20.34) ; R92.2@61.4,17.01 v1(61.82,17) ; R99.2@61.4,19.85 v1(61.82,19.84) ; v1(63.44,13.74) R90.2@63.45,14.17 ; v1(63.44,16.58) R93.2@63.45,17.01 ; 26.35,4.85 v1(27.93,4.85)
  Bottom Layer w0.23: U3.43@29.95,17.53 29.95,18.365 31.2,18.365 ; 33.5,18.365 34.75,18.365 U3.49@34.75,17.53
  Bottom Layer w0.24: C113.1@42.15,7.65 42.4,8.4
  Bottom Layer w0.25: v1(40.85,15.6) 40.85,14.9 41.4,14.9 41.9,14.7 C112.1@42.15,14.45
  Bottom Layer w0.29: 31.2,18.365 R81.1@31.2,19.05 ; 33.5,18.365 R82.1@33.5,19.05
  Bottom Layer w0.3: C13.2@3.45,21.44 3.658,20.656 5.224,20.704 5.459,20.711 5.95,20.726 ; C80.2@3.907,16.652 3.907,17.551 5.95,19.595 5.95,20.726 ; C11.2@5.95,21.39 5.95,20.726 ; C12.2@8.25,21.39 8.25,20.625 ; R35.2@10.55,21.39 10.55,21.387 9.788,20.625 8.25,20.625 ; R34.8@10.62,18.39 R34.8@10.62,18.669 ; R34.7@11.42,18.39 11.42,18.669 R34.8@10.62,18.669 ; R97.2@18.15,19.35 18.339,19.539 18.339,19.609 18.881,20.151 20.32,20.151 20.55,19.921 R96.2@20.55,18.75 21.104,19.304 24.816,19.304 25.425,18.695 U10.8@27.215,18.695 ; C9.2@19.05,4.25 19.05,3.552 18.999,3.501 L4.2@19.45,3.05 ; L5.2@22.25,3.05 22.708,3.507 22.708,4.801 25.15,4.801 ; C134.2@23.95,3.95 23.95,4.75 24.87,4.75 25.15,4.47 ; C135.2@25.15,3.95 25.15,4.148 ; C138.2@28.75,3.95 28.749,4.85 ; v1(28.925,20.375) C156.2@29.25,20 28.478,19.228 27.432,19.228 27.215,19.011 U10.8@27.215,18.695 ; C5.2@31.55,3.05 31.55,2.438 ; C38.2@33.549,3.95 33.549,3.704 33.85,3.403 C6.2@33.85,3.05 33.85,1.559 ; v1(34.696,1.549) 34.108,0.961 ; U3.49@34.75,17.53 34.75,16.487 34.138,15.875 30.48,15.875 29.95,16.405 U3.43@29.95,17.53 29.616,17.864 29.616,18.517 29.134,18.999 28.931,18.999 28.626,18.695 U10.8@27.215,18.695 ; C7.2@36.15,3.05 36.15,2.438 ; U3.1@38.75,6.17 38.75,5.486 38.547,5.283 37.353,5.283 37.15,5.486 ; C100.1@40.35,21.1 40.35,19.65 C120.1@42.15,17.85 ; 41.9,14.7 41.665,14.935 40.005,14.935 39.268,14.199 39.268,10.566 37.186,8.484 37.186,6.35 37.15,6.35 U3.3@37.15,6.17 37.15,5.486 ; C113.1@42.15,7.65 42.15,7.885 42.469,8.204 48.407,8.204 50.476,8.204 C115.1@51.03,7.65 51.232,7.448 51.232,6.299 51.562,5.969 52.95,5.969 ; C109.1@44.37,7.65 44.37,8.2 ; C117.1@44.37,17.85 44.37,18.288 ; v1(45.542,19.025) 44.679,19.025 44.37,18.716 44.37,18.288 ; C116.1@46.59,17.85 46.59,18.377 ; C118.1@48.81,17.85 48.063,17.85 47.625,18.288 47.625,18.745 47.441,18.929 47.142,18.929 46.59,18.377 ; v1(49.65,20.3) C103.1@49.65,21.1 49.65,19.99 49.015,19.355 47.142,19.355 46.59,18.802 46.59,18.491 ; C111.1@51.03,11.05 51.03,10.996 51.409,10.617 ; v1(51.41,12.802) 51.498,12.802 C119.1@53.25,11.05 53.036,11.05 52.603,10.617 51.409,10.617 ; v1(52.248,20.269) 52.248,20.218 52.4,20.066 52.451,20.066 52.749,20.364 C104.1@52.749,21.1 53.137,21.1 53.137,20.518 54.147,19.507 54.554,19.507 55.849,20.803 C105.1@55.849,21.1 ; R20.2@52.95,3.95 52.95,4.877 ; R23.1@54.75,3.95 54.75,5.27 54.508,5.512 53.585,5.512 52.95,4.877 ; v1(56.7,21.1) C105.1@55.849,21.1 ; R6.2@57.249,22.05 57.249,22.296 ; R1.4@57.8,2.85 57.8,3.404 58.471,3.404 v1(59.157,2.718) ; v1(58.42,6.172) 58.217,5.969 52.95,5.969 ; v1(58.45,22.55) R7.2@58.449,22.05 ; R91.2@59.35,17.01 59.538,17.01 59.764,17.237 59.764,17.424 ; R99.2@61.4,19.85 61.4,20.088 61.244,20.244 59.749,20.244 ; R90.2@63.45,14.17 63.602,14.322 63.602,17.162 ; R93.2@63.45,17.01 63.602,17.162 ; 5.95,20.726 6.458,20.218 8.656,20.218 ; 8.25,20.625 8.656,20.218 ; 8.656,20.218 9.231,20.218 10.62,18.83 R34.8@10.62,18.669 ; 25.15,4.148 25.15,4.47 ; 25.15,4.148 25.4,4.398 28.495,4.398 ; 25.15,4.47 25.15,4.801 ; 25.15,4.801 27.903,4.801 27.909,4.801 28.092,4.801 28.495,4.398 ; 28.495,4.398 28.956,3.937 28.956,3.579 C4.2@28.956,2.946 ; C4.2@28.956,2.946 30.074,1.829 30.941,1.829 31.55,2.438 ; C4.2@28.956,2.946 28.956,2.896 30.81,1.041 32.175,1.008 32.625,0.997 34.108,0.961 ; 31.55,2.438 31.55,1.063 31.58,1.033 32.172,1.033 33.325,1.033 33.85,1.559 ; 33.85,1.559 33.85,1.219 34.108,0.961 ; 34.108,0.961 34.307,0.762 35.687,0.762 36.28,1.355 36.28,1.825 36.15,1.955 36.15,2.438 ; 36.15,2.438 36.353,2.235 38.247,2.235 38.45,2.438 C8.2@38.45,3.05 38.45,3.429 38.075,3.429 37.846,3.658 37.846,4.689 37.15,5.385 37.15,5.486 ; 44.37,18.288 44.802,18.72 46.361,18.72 46.59,18.491 ; 46.59,18.377 46.59,18.491 ; 51.409,10.617 51.918,10.617 52.045,10.744 ; v1@51.41,12.827 v1@51.435,12.802 ; v1@51.41,12.827 v1@51.435,12.802 ; v1@51.41,12.827 51.384,12.827 v1(51.384,12.802) 51.206,12.979 51.206,13.208 51.308,13.208 51.41,13.106 v1@51.41,12.827 ; v1@51.435,12.802 52.045,12.192 ; 52.045,10.744 52.045,12.192 ; 52.045,10.744 52.045,12.192 ; 52.95,4.877 52.95,5.969 ; C105.1@55.849,21.1 55.849,21.946 56.408,22.504 57.099,22.504 57.249,22.355 57.249,22.296 ; 57.249,22.296 57.506,22.553 58.115,22.553 58.449,22.219 R7.2@58.449,22.05 ; R7.2@58.449,22.05 59.749,20.75 59.749,20.244 ; 59.749,19.451 59.749,20.244 ; 59.749,19.451 R94.2@59.35,19.85 59.744,20.244 59.749,20.244 ; 59.749,19.451 59.764,19.436 59.764,17.424 ; 59.764,17.424 61.062,17.424 R92.2@61.4,17.01 62.018,17.628 63.542,17.628 63.602,17.568 63.602,17.162
  Bottom Layer w0.4: C80.2@3.907,16.652 U5.4@5.458,16.752
  Bottom Layer w1: v1(2.625,16.125) 3.024,16.289 C80.2@3.907,16.652 ; v1(2.625,17.15) 3.011,17 C80.2@3.907,16.652 ; v1(2.875,16.65) C80.2@3.907,16.652 ; L1.2@5.233,18.753 C80.2@3.907,16.652
  other v1: 44.4,9.9
VCCADC: C123.1 C124.1 L7.2 U1.C13 | length 28
  Top Layer w0.15: v1(47.4,14.9) U1.C13@47.9,15.4
  L3-SIG w0.15: v1(47.8,5.25) 47.8,7.35
  L3-SIG w0.2: v1(47.4,14.9) 47.4,15.45 50.33,15.45 50.33,8.05 47.8,8.05 47.8,7.35 ; v1(47.8,5.25) 47.8,3.9 53.34,3.9 v1(53.34,2.3)
  Bottom Layer w0.3: v1(47.4,14.9) C123.1@47.45,14.45 ; v1(47.8,5.25) C124.1@47.95,4.25 ; L7.2@52.45,3.05 v1(53.34,2.3)
VU: C78.2 C147.2 C148.2 C149.2 R107.2 R108.2 U5.1 U5.3 U6.1 U6.3 U7.1 U7.3 U8.5 U8.10 U8.11 X2.22 | length 102.1
  Top Layer w0.4: v1(12,11) 12.155,11 v1(12.44,11)
  Top Layer w0.55: 15.58,4.949 16.06,4.949
  Top Layer w0.6: 42.2,2.85 42.7,2.53 46.9,2.53 47.6,3.2
  Top Layer w0.7: 15.29,4.949 15.58,4.949 ; 16.06,4.949 16.35,4.949 ; 27.3,4.1 27.6,3.3 30.35,3.3 30.35,6.4 34.45,6.4 34.45,3.366 34.9,2.85
  Top Layer w1: v1@12.155,11 12.155,5.6 13.2,4.949 ; 14.96,4.949 15.29,4.949 ; 16.35,4.949 16.69,4.949
  Top Layer w1.2: 34.9,2.85 42.2,2.85 ; 47.6,3.2 48.2,3.6
  Top Layer w1.4: 25.6,4.949 27.3,4.1
  Top Layer w1.5: 13.2,4.949 14.96,4.949 ; 16.69,4.949 25.6,4.949 ; 48.2,3.6 56,3.6 X2.22@57.15,1.27
  Bottom Layer w0.2: U5.3@5.458,14.252 5.458,11.65 7.555,11.65 C148.2@7.555,10.95 ; U6.3@5.954,8.36 8.6,8.36 ; C149.2@9.749,11.65 9.072,11.65 8.75,11.65 8.75,11.965 8.75,14.24 U7.3@11.35,14.24
  Bottom Layer w0.24: 9.5,5.15 U8.5@10.1,5.15 ; U8.10@11.25,7.3 11.5,7.3 U8.11@11.75,7.3
  Bottom Layer w0.3: R108.2@6.5,6.45 R107.2@7.85,6.45 8.6,6.45 ; 8.6,10.95 8.6,8.36 8.6,6.45 ; 9.5,5.15 8.6,5.15 8.6,6.45
  Bottom Layer w0.5: 11.5,7.3 C78.2@11.5,8.651
  Bottom Layer w0.6: 11.5,10.05 v1(12,11) v1(12.44,11)
  Bottom Layer w0.8: U6.1@5.954,10.26 C148.2@7.555,10.95 8.6,10.95 9.491,10.707 10.25,10.5 9.418,11.312 9.072,11.65 8.75,11.965 C147.2@8.048,12.651 U5.1@7.358,14.252 ; C149.2@9.749,11.65 U7.1@11.35,12.34
  Bottom Layer w1: C149.2@9.749,11.65 10.25,10.5 11.5,10.05 C78.2@11.5,8.651
WE#: U1.V4 U3.16 | length 20.5
  Top Layer w0.076: v1(41.9,4.4) 43.15,6.55 43.15,7.187 43.15,7.65 U1.V4@43.4,7.9
  L3-SIG w0.125: v1(27.15,6.975) 27.15,6.725 28.35,5.525 38.625,5 39.95,4.725 40.175,4.525 41.55,4.3 v1(41.9,4.4)
  Bottom Layer w0.125: U3.16@26.75,6.17 v1(27.15,6.975)
pads on no net: U1.A2 U1.A8 U1.A10 U1.B2 U1.B8 U1.B10 U1.D1 U1.D2 U2.3 U2.23 U2.24 U2.26 U2.27 U2.28 U2.29 U2.30 U2.32 U2.33 U2.34 U2.36 U2.44 U2.45 U2.46 U2.48 U2.52 U2.53 U2.54 U2.55 U2.57 U2.58 U2.59 U3.40 U10.6 U10.7 X1.4 X3.A X3.B X4.MP1 X4.MP2

## Polygon pours and split planes (outlines as drawn)
GND on L2-GND (split plane): 69.34,0.51 0.51,0.51 0.51,24.89 69.34,24.89
VCC3V3 on L5-VCC3V3 (split plane): 69.34,0.51 0.51,0.51 0.51,24.89 69.34,24.89

## Keep-outs
Top Layer:
  rectangle: 3.075,10.525 5.075,13.025
  rectangle: 7.275,7.575 9.275,16.075

## Silkscreen, mask and mechanical layers (free items; w line width, h text height)
Mechanical 1:
  the board outline again, w0.1

## Text inside footprints (layer, text, board x,y; h text height)
U$2: Mechanical 3 "CC" at 3.027,-7.711 h3.94
U$3: Mechanical 3 "BY" at 9.371,-13.056 h2.76
U$4: Mechanical 3 "SA" at 13.927,-13.056 h2.76
U$5: Mechanical 3 "C" at 19.916,-8.371 h5.91